# Altium PCB TEMPLATE_PCB_2L.PcbDoc
Units mm, origin at the board's own origin, x right, y up, seen from the top; angles counter-clockwise.
Board outline 70 x 50 mm, 2 copper layers (Top, Bottom), stack 1.54 mm thick; 15 components, 11 nets, 66 pads, 3 vias.
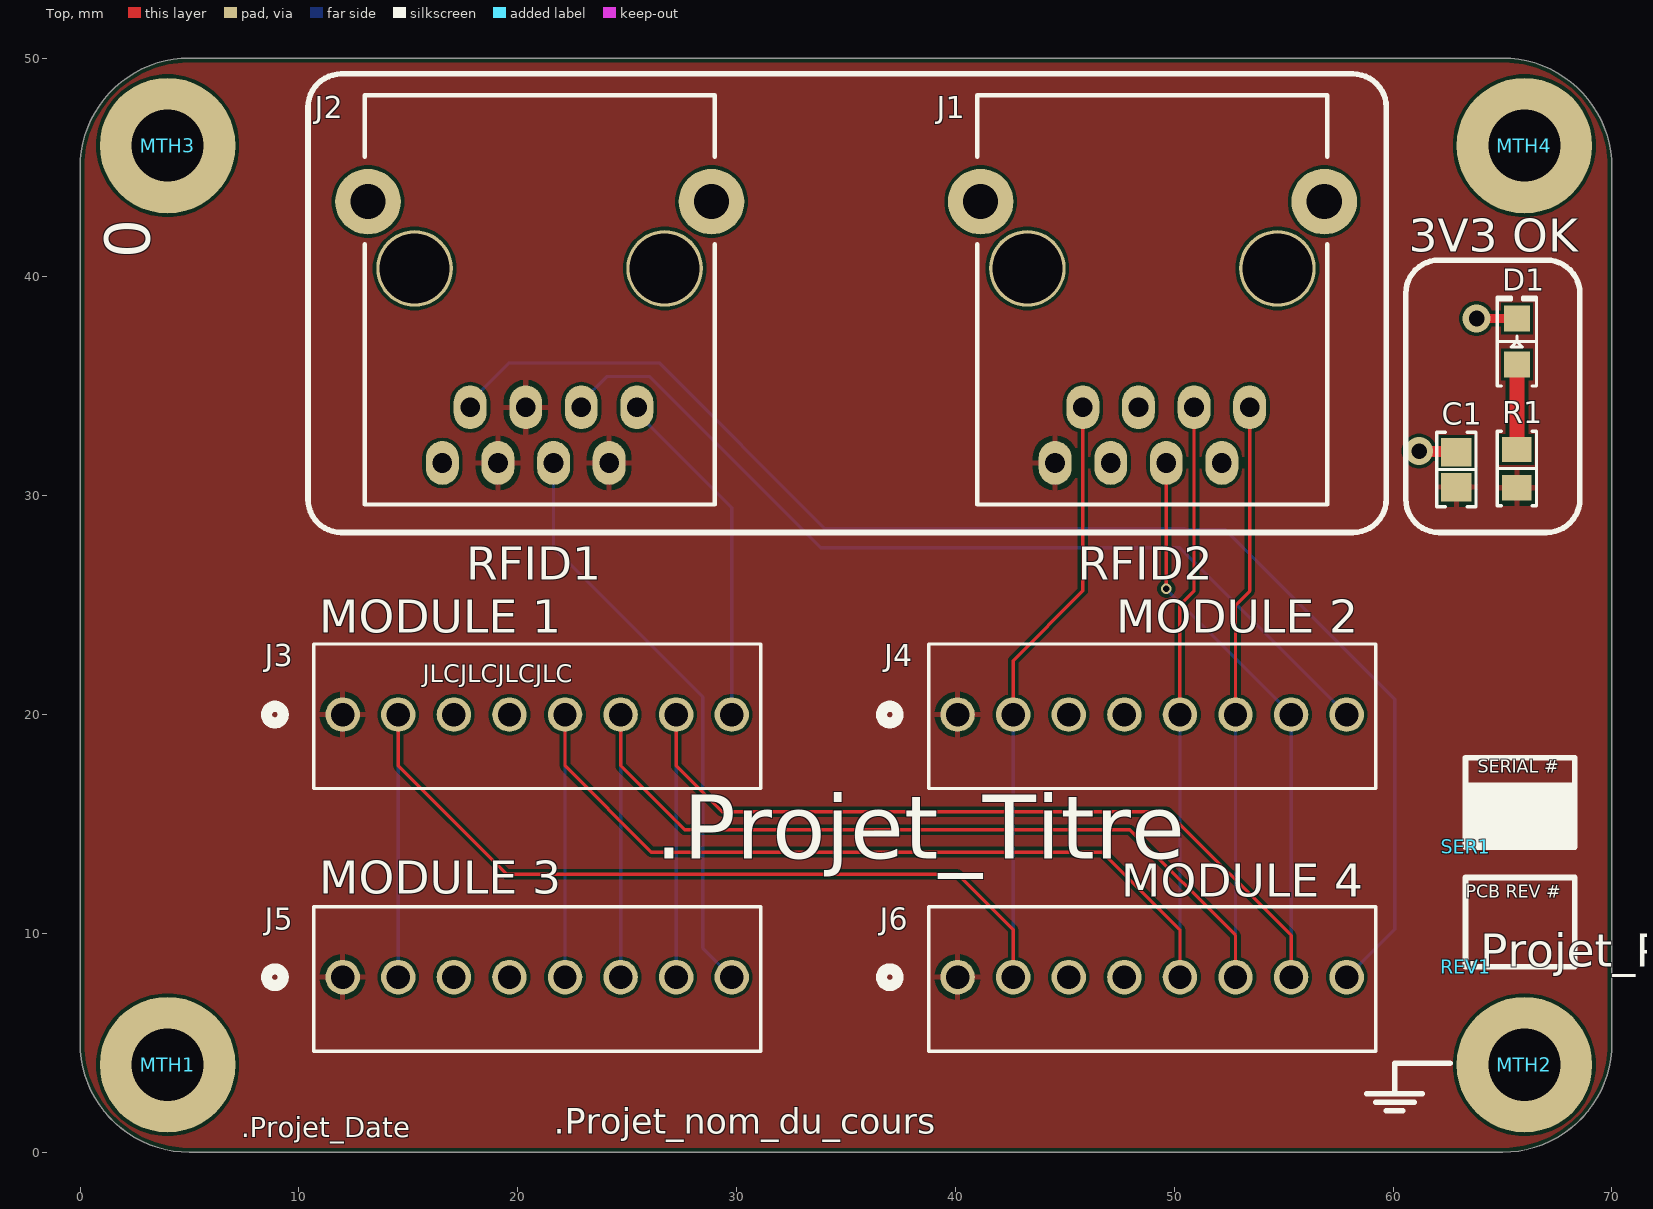
[diagram p0: Top view]
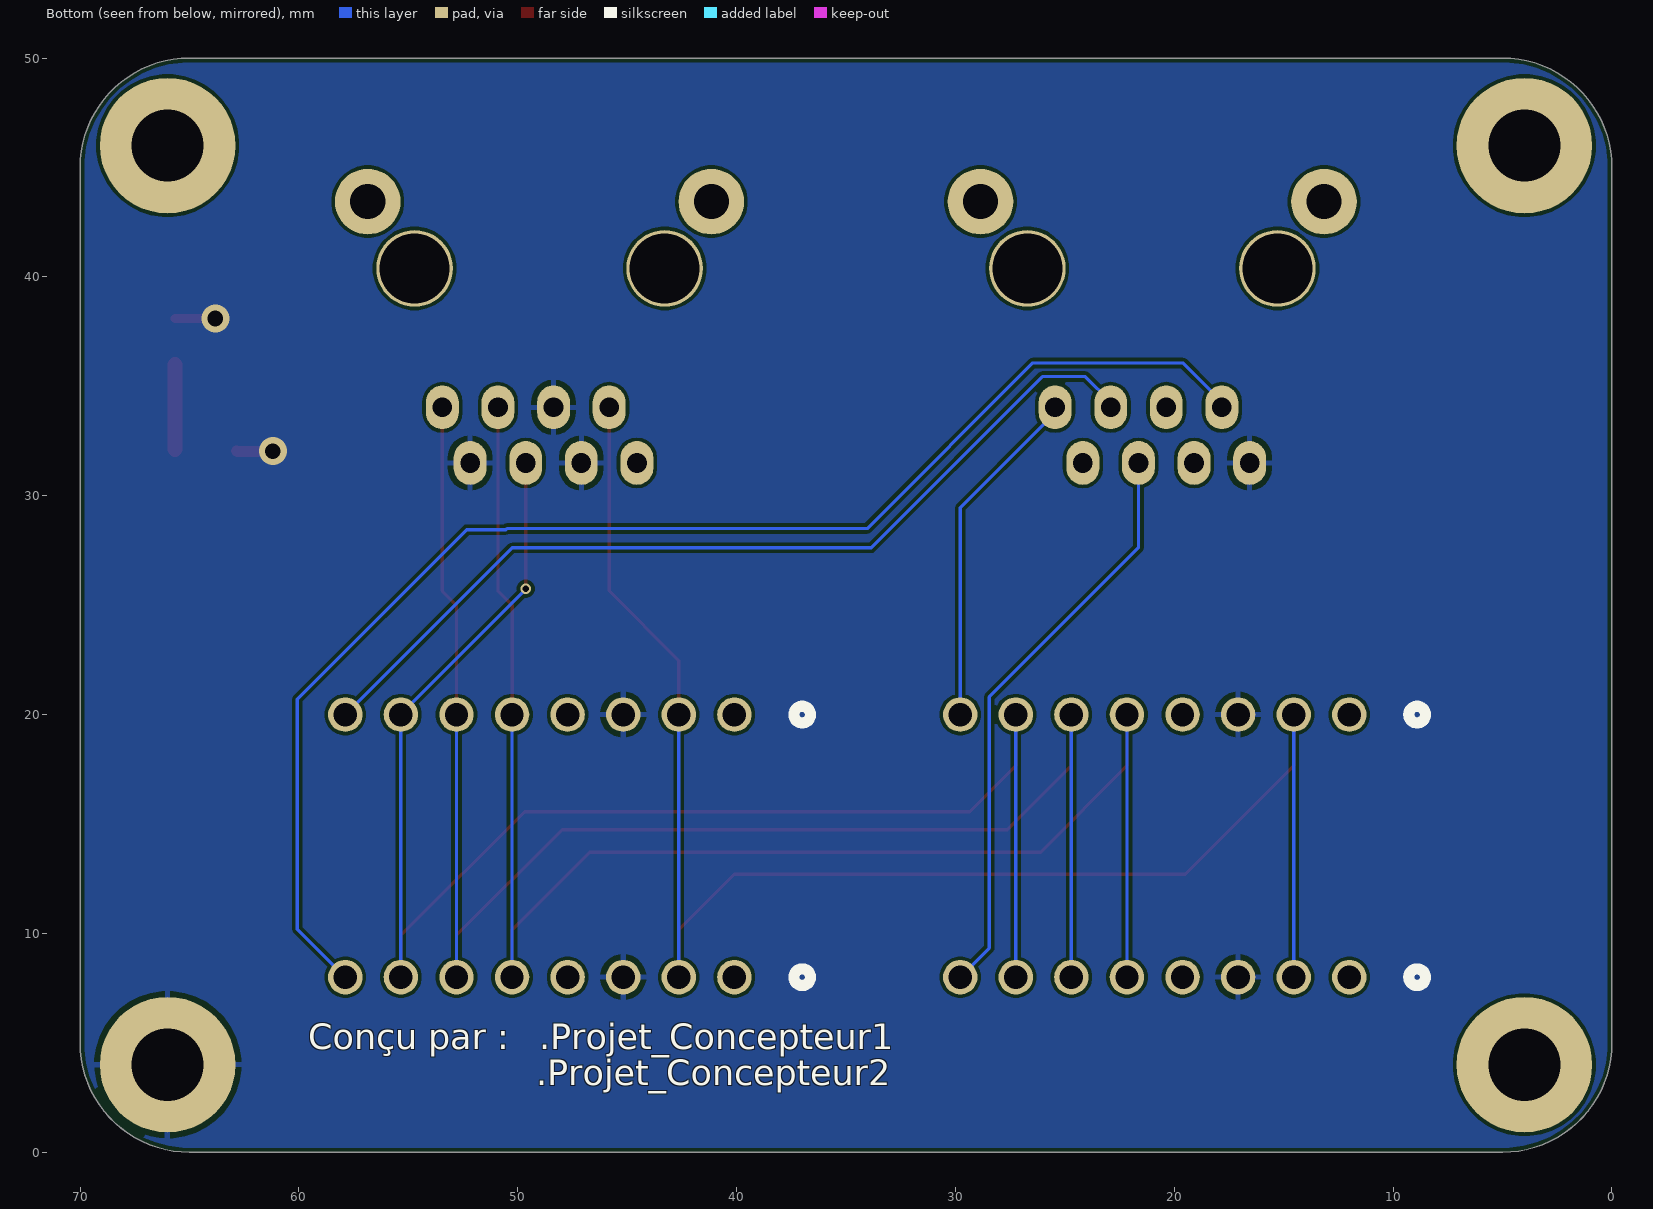
[diagram p1: Bottom view, seen from below]
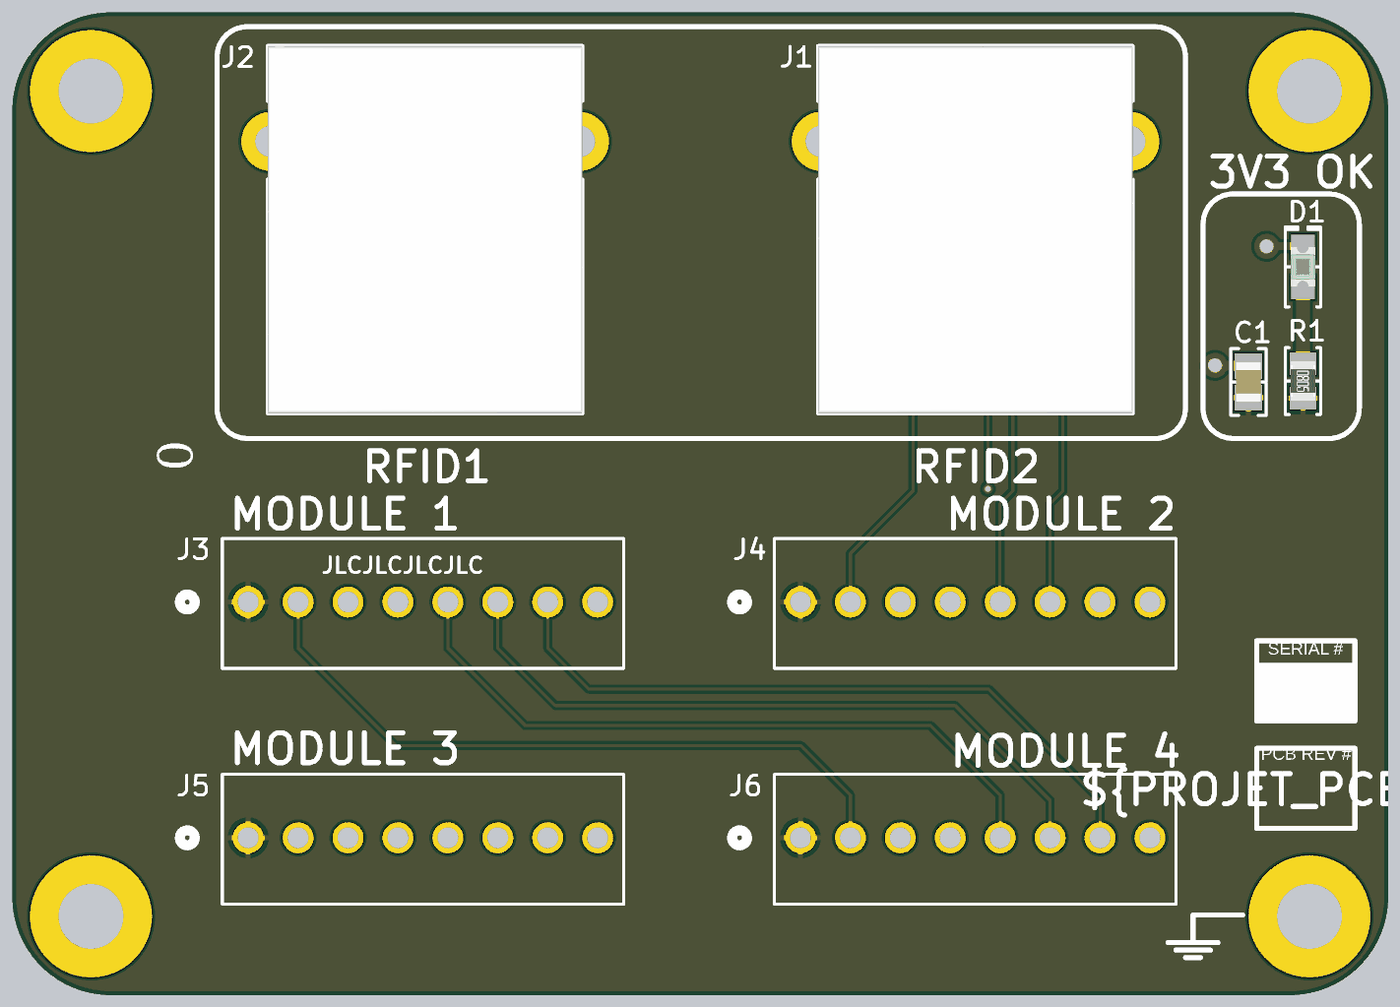
[diagram p2: 3D render of the assembled board from above, using the file's embedded part models]

## Layer stack, top to bottom
Top Solder: solder mask 0.0102, Solder Resist, Dk 3.5
Top: signal copper 0.035
Dielectric 1: core 1.47, FR-4, Dk 4.6
Bottom: signal copper 0.035
Bottom Solder: solder mask 0.0102, Solder Resist, Dk 3.5

## Board outline
0,5 0,45 cw(c5,45) 5,50 65,50 cw(c65,45) 70,45 70,5 cw(c65,5) 65,0 5,0 cw(c5,5)

## Design rules (kind name [scope] priority, off if disabled: settings)
BoardOutlineClearance [All] p1: gap=0.2 ignorepadtopadclearanceinfootprint=FALSE except(0: Arc-SplitContinuation Track-SplitContinuation SMDPad-SplitContinuation THPad-SplitContinuation Via-SplitContinuation Fill-SplitContinuation Poly-SplitContinuation Region-SplitContinuation Text-SplitContinuation)
Clearance "Schematic Clearance Constraint_1" [InComponent('REV1')] p1: gap=0.254 ignorepadtopadclearanceinfootprint=FALSE except(0: Arc-Text Track-Text Text-Text)
Clearance "Schematic Clearance Constraint" [InComponent('SER1')] p2: gap=0.254 ignorepadtopadclearanceinfootprint=FALSE except(0: Arc-Text Track-Text Text-Text)
Clearance [All] p3: gap=0.152 ignorepadtopadclearanceinfootprint=FALSE except(0.127: Arc-Arc Arc-Track Arc-Hole Track-Track Track-Hole SMDPad-Fill SMDPad-Poly SMDPad-Region SMDPad-Hole THPad-Hole Via-Hole Fill-Hole Poly-Hole Region-Hole Text-Hole; 0.2: Arc-SMDPad Track-SMDPad; 0.254: Arc-Via Track-Via Via-Via; 0.33: Arc-THPad Track-THPad; 0.5: THPad-THPad)
ComponentClearance "Schematic Component Clearance Constraint_1" [InComponent('SER1')] p1: gap=0 collisioncheckmode=3 verticalgap=0 showdistances=FALSE
ComponentClearance "Schematic Component Clearance Constraint" [InComponent('REV1')] p2: gap=0 collisioncheckmode=3 verticalgap=0 showdistances=FALSE
ComponentClearance [All] p3: gap=0.102 collisioncheckmode=3 verticalgap=0.102 showdistances=FALSE
HoleSize [All] p1: absolutevalues=TRUE maxlimit=6.3 minlimit=0.3 maxpercent=80.000 minpercent=20.000
HoleToHoleClearance [All] p1: gap=0.45 allowstackedmicrovias=FALSE
MinimumAnnularRing [All] p1: minimumring=0.1
MinimumSolderMaskSliver [All] p1: minsoldermaskwidth=0.1
PlaneClearance [All] p1: clearance=0.152
PlaneConnect [All] p1: pad.planeconnectstyle=Relief pad.reliefexpansion=0.508 pad.reliefentries=4 pad.reliefconductorwidth=0.254 pad.reliefairgap=0.254 via.planeconnectstyle=Direct via.reliefexpansion=0.508 via.reliefentries=4 via.reliefconductorwidth=0.254 via.reliefairgap=0.254
PolygonConnect [All] p1: thpad.connectstyle=Relief thpad.reliefconductorwidth=0.254 thpad.reliefentries=4 thpad.polygonreliefangle="90 Angle" thpad.airgapwidth=0.254 smdpad.connectstyle=Relief smdpad.reliefconductorwidth=0.254 smdpad.reliefentries=4 smdpad.polygonreliefangle="90 Angle" smdpad.airgapwidth=0.254 via.connectstyle=Direct via.reliefconductorwidth=0.254 via.reliefentries=4 via.polygonreliefangle="90 Angle" via.airgapwidth=0.254
RoutingVias [All] p1: holewidth=0.3 width=0.5 viastyle="Through Hole" minholewidth=0.3 minwidth=0.5 maxholewidth=6.3 maxwidth=6.5
SilkToSilkClearance [All] p1: silktosilkclearance=0.102
SilkToSolderMaskClearance [IsPad] p1: minsilkscreentomaskgap=0.024 clearancetoexposedcopper=FALSE
SolderMaskExpansion SolderMaskExpansion_Via [isVia] p1: expansion=0.102 istentingtop=TRUE
SolderMaskExpansion [All] p2: expansion=0.051 istentingtop=FALSE
SupplyNets "Schematic Supply Nets_1" [InNet('3V3')] p1: voltage=0.000
SupplyNets "Schematic Supply Nets" [InNet('GND')] p2: voltage=0.000
Width [All] p1: maxlimit=25.4 minlimit=0.127 preferedwidth=0.152 minimp=50.000000 maximp=50.000000 favimp=50.000000
22 further rules are at their usual default settings.

## Classes and differential pairs
component class TEMPLATE_Circuit: C1 D1 J1 J2 J3 J4 J5 J6 MTH1 MTH2 MTH3 MTH4 R1
component class TEMPLATE_Title: REV1 SER1

## Components (designator, comment, footprint, x,y, rotation, side; value= is the part's Value field where it differs from the comment)
C1 "0.1 µF" "CAP 0805_2012" 62.892,31.196 r270 top
D1 "Green" "LED 0805_2012 GREEN" 65.659,37.05 r90 top
J1 "A-2004-2-4-LPS-N-R" "ASSMANN A-2004-2-4-LPS-N-R" 49,39 r180 top locked
J2 "A-2004-2-4-LPS-N-R" "ASSMANN A-2004-2-4-LPS-N-R" 21,39 r180 top locked
J3 "22232081" CONN_A-6373-08A_MOL 12,20 r0 top locked
J4 "22232081" CONN_A-6373-08A_MOL 40.1,20 r0 top locked
J5 "22232081" CONN_A-6373-08A_MOL 12,8 r0 top locked
J6 "22232081" CONN_A-6373-08A_MOL 40.1,8 r0 top locked
MTH1 "MTH_M3" MTH_M3 4,4 r0 top locked
MTH2 "MTH_M3" MTH_M3 66,4 r0 top locked
MTH3 "MTH_M3" MTH_M3 4,46 r0 top locked
MTH4 "MTH_M3" MTH_M3 66,46 r0 top locked
R1 "330 Ohms" "RES 0805_2012" 65.659,31.242 r270 top
REV1 "Revision Cartridge Mini" REV_REVISION_CARTRIDGE_MINI 63.311,8.479 r0 top
SER1 "Serial Cartridge MICRO" SER_SERIAL_CARTRIDGE_MICRO 63.311,13.949 r0 top

## Footprints (in the part's own frame and the unit in brackets; to place one, negate y for a bottom-side part, rotate by r counter-clockwise, add the part's x,y. Pads: shape width x height; smd on the part's side, far side on the other; paste and mask are expansions set on the pad)
"ASSMANN A-2004-2-4-LPS-N-R" [mm]
  oval 1.5x2 hole 0.9: 1(-4.445,4.96) 2(-3.175,7.5) 3(-1.905,4.96) 4(-0.635,7.5) 5(0.635,4.96) 6(1.905,7.5) 7(3.175,4.96) 8(4.445,7.5)
  round 3 hole 1.6: S(-7.855,-4.44) S(7.845,-4.44)
  round 3.5 hole 3.2: S(-5.715,-1.39) S(5.715,-1.39)
  silkscreen extent -8,-9.3 8,9.4, body extent -8,-9.3 8,9.4, height 13.3
"CAP 0805_2012" [mm] "Chip Capacitor, 2-Leads, Body 2.00x1.20mm, IPC Medium Density"
  rect 1.3x1.4 smd: 1(-0.8,0) 2(0.8,0)
  silkscreen extent -1.7,-0.9 1.7,0.9, body extent -1,-0.64 1,0.64, height 1.26
CONN_A-6373-08A_MOL [mil]
  round 62 hole 42: 1(0,0) 2(100,0) 3(200,0) 4(300,0) 5(400,0) 6(500,0) 7(600,0) 8(700,0)
  silkscreen extent -137,-133 752,127
"LED 0805_2012 GREEN" [mm] "Chip Diode, 2-Leads, Body 2.00x1.25mm, IPC Medium Density"
  rect 1.2x1.2 smd: 1(-1.05,0) 2(1.05,0)
  silkscreen extent -2.03,-0.9 2.03,0.9, body extent -1,-0.62 1,0.63, height 0.9
MTH_M3 [mm] "Mounting Hole Metric M3"
  round 6.2 hole 3.3 paste-2539.97 mask+0.07: 1(0,0)
"RES 0805_2012" [mm] "Chip Resistor, 2-Leads, Body 2.00x1.25mm, IPC Medium Density"
  rect 1.15x1.35 smd: 1(-0.875,0) 2(0.875,0)
  silkscreen extent -1.7,-0.9 1.7,0.9, body extent -1,-0.62 1,0.63, height 0.6
REV_REVISION_CARTRIDGE_MINI [mm]
  silkscreen extent 0,0 5,4.08
SER_SERIAL_CARTRIDGE_MICRO [mm]
  silkscreen extent 0,0 5.02,4.08

## Part data
C1: library part 0805J0250104KXT, "CAP CER 0.1UF 25V X7R 0805", Device Package="0805 (2012 Metric)", Manufacturer="Knowles Syfer", Operating Temperature="-55°C ~ 125°C", Supplier Part Number 1=1608-0805J0250104KXTCT-ND, Temperature Coefficient=X7R, Tolerance=±10%, Voltage - Rated=25V, Applications="General Purpose", Capacitance="0.1 µF", ComponentLink1Description=Datasheet, ComponentLink1URL=https://www.knowlescapacitors.com/getattachment/2dbfc8bc-e2b3-4b4d-afb1-43b011b9ebe0/High-Std-Voltage.aspx, ComponentLink2Description="DigiKey Link", ComponentLink2URL=https://www.digikey.com/en/products/detail/knowles-syfer/0805J0250104KXT/6304940, LastUpdated="2024-02-09 8:13:16 PM", Lifecycle Status=Active, Minimum Order=1, Mounting Type="Surface Mount, MLCC", Package / Case="0805 (2012 Metric)", Packaging=TapeAndReel, Part Number=0805J0250104KXT, PartId=57221, Price=0.08, Series=-, Size / Dimension="0.079\" L x 0.049\" W (2.00mm x 1.25mm)", Supplier 1=DigiKey, Thickness (Max)="0.051\" (1.30mm)"
D1: library part 5975316507F, "LED GREEN 0805 SMD", Current - Test=20mA, Device Package="0805 (2012 Metric)", Lens Color=0.93mm, Manufacturer=Dialight, Millicandela Rating=16mcd, Supplier Device Package=0805, Supplier Part Number 1=350-4389-1-ND, Voltage - Forward (Vf) (Typ)=2.2V, Color=Green, ComponentLink1Description=Datasheet, ComponentLink1URL=http://www.dialightsignalsandcomponents.com/Assets/Drawings/2D_Drawings_DrawingDetailedSpec/NewDrawings/18370A.pdf, ComponentLink2Description="DigiKey Link", ComponentLink2URL=https://www.digikey.com/en/products/detail/dialight/5975316507F/9385444, Configuration=Standard, Height (Max)=0.93mm, LastUpdated="2024-06-03 8:00:30 PM", Lens Size="1.40mm x 1.24mm", Lens Style="Rectangle with Flat Top", Lifecycle Status=Active, Minimum Order=1, Mounting Type="Surface Mount", Package / Case="0805 (2012 Metric)", Packaging=TapeAndReel, Part Number=5975316507F, Part Status=Active, PartId=245, Price=0.12, Series=597, Size / Dimension="2.00mm L x 1.25mm W", Supplier 1=DigiKey, Wavelength - Dominant=560nm
J1 J2: "CONN MOD JACK 8P8C R/A SHIELDED", LED Color="Does Not Contain LED", Manufacturer="Assmann WSW Components", Supplier Part Number 1=AE10387-ND, ComponentLink1Description=Datasheet, ComponentLink1URL=http://www.assmann-wsw.com/fileadmin/datasheets/ASS_7323_CO.pdf, ComponentLink2Description="DigiKey Link", ComponentLink2URL=http://digikey.com/product-detail/en/assmann-wsw-components/A-2004-2-4-LPS-N-R/AE10387-ND/2183638, Connector Type=Jack, Contact Finish=Gold, Contact Material="Phosphor Bronze", Features="Board Lock", LastUpdated="2020-01-15 3:54:20 AM", Lifecycle Status=Active, Minimum Order=1, Mounting Type="Through Hole", Number of Ports=1, Number of Positions/Contacts="8p8c (RJ45, Ethernet)", Number of Rows=1, Orientation="90° Angle (Right)", Packaging=Tray, Part Number=A-2004-2-4-LPS-N-R, Part Status=Active, Price=1.05, Series=-, Shielding=Shielded, Supplier 1=DigiKey, Tab Direction=Down, Termination=Solder
J3 J4 J5 J6: Package=None, Availability=Unavailable, MP=22232081, Price=None
MTH1 MTH2 MTH3 MTH4: library part CMP-006-000008-2, "MTH - MOUNTING HOLE M3 PLATED - M3", Package=M3, Assembly Type=NONE, Component Type="Standard (No BOM)", Design Item ID=MTH_M3, HelpURL=https://littlemachineshop.com/images/gallery/PDF/TapDrillSizes.pdf, Pin Count=1, Source=CEGEP_SHERBROOKE_TGE_LIBRARY.SchLib
R1: library part ERJ-PB6B3300V, "RES SMD 330 OHM 0.1% 1/4W 0805", Device Package="0805 (2012 Metric)", Manufacturer="Panasonic Electronic Components", Operating Temperature="-55°C ~ 155°C", Power (Watts)="0.25W, 1/4W", Ratings=AEC-Q200, Supplier Device Package=0805, Supplier Part Number 1=P20537CT-ND, Temperature Coefficient=±50ppm/°C, Tolerance=±0.1%, ComponentLink1Description=Datasheet, ComponentLink1URL=https://industrial.panasonic.com/cdbs/www-data/pdf/RDM0000/AOA0000C328.pdf, ComponentLink2Description="DigiKey Link", ComponentLink2URL=https://www.digikey.com/en/products/detail/panasonic-electronic-components/ERJ-PB6B3300V/6213320, Composition="Thick Film", Features="Automotive AEC-Q200, Pulse Withstanding", Height - Seated (Max)="0.028\" (0.70mm)", LastUpdated="2024-02-08 9:02:05 PM", Lifecycle Status=Active, Minimum Order=1, Number of Terminations=2, Package / Case="0805 (2012 Metric)", Packaging=TapeAndReel, Part Number=ERJ-PB6B3300V, Part Status=Active, PartId=35583, Price=0.04, Resistance="330 Ohms", Series=ERJ-PB6, Size / Dimension="0.079\" L x 0.049\" W (2.00mm x 1.25mm)", Supplier 1=DigiKey
REV1: library part REV_REVISION_CARTRIDGE_MINI, "REV - REVISION CARTRIDGE MINI", Assembly Type=NONE, Rule="Component Clearance Constraint [Horizontal Clearance = 0mil    Vertical Clearance = 0mil]"
SER1: library part SER_SERIAL_CARTRIDGE_MICRO, "SER - SERIAL CARTRIDGE MICRO", Assembly Type=NONE, Rule="Component Clearance Constraint [Horizontal Clearance = 0mil    Vertical Clearance = 0mil]"

## Via types
v1: diameter 1.27, hole 0.711, Top to Bottom, tented both sides, 2 vias
v2: diameter 0.5, hole 0.3, Top to Bottom, tented both sides, 1 vias

## Nets (pads, with @x,y where several pads share a name; then routed paths per layer and width w, separated by ;. In a path a pad name is that pad's centre, name@x,y a point inside that pad or via, vN(x,y) a via of type N, cw(c..) or ccw(c..) an arc to the next point about the centre after c; other vN are vias at no path point)
3V3: C1.2 J1.8 J2.2 J2.5 J2.6 J3.1 J4.1 J5.1 J6.1 R1.2
GND: C1.1 D1.2 J1.2 J1.5 J1.6 J2.8 J3.3 J4.3 J5.3 J6.3 MTH2.1 | length 3.6
  Top w0.152: C1.1@62.846,32.042 C1.1
  Top w0.4: v1(63.815,38.1) D1.2
  Top w0.508: v1(61.189,32.042) 61.212,32.019 62.823,32.019 C1.1@62.846,32.042
MISO_RFID: J1.3 J3.5 J4.5 J5.5 J6.5 | length 74
  Top w0.152: J3.5 22.16,17.653 26.097,13.716 28.067,13.716 46.712,13.716 50.26,10.168 J6.5 ; J4.5 50.25,20.01 50.25,24.999 50.905,25.654 J1.3
  Bottom w0.152: J5.5 J3.5 ; J6.5 J4.5
MOSI_RFID: J1.1 J3.6 J4.6 J5.6 J6.6 | length 73.9
  Top w0.152: J3.6 24.7,17.653 27.621,14.732 31.101,14.732 47.973,14.732 52.8,9.905 J6.6 ; J4.6 52.8,24.999 53.445,25.644 J1.1
  Bottom w0.152: J5.6 J3.6 ; J6.6 J4.6
NetD1_1: D1.1 R1.1 | length 3.9
  Top w0.7: R1.1 D1.1
RESET_RFID: J1.7 J3.2 J4.2 J5.2 J6.2 | length 75.1
  Top w0.152: J3.2 14.54,17.653 19.493,12.7 21.635,12.7 40.108,12.7 42.64,10.168 J6.2 ; J4.2 42.64,22.469 45.825,25.654 J1.7
  Bottom w0.152: J5.2 J3.2 ; J6.2 J4.2
SCK_RFID: J1.4 J3.7 J4.7 J5.7 J6.7 | length 73.4
  Top w0.152: J3.7 27.24,17.653 29.334,15.559 33.274,15.559 49.686,15.559 55.34,9.905 J6.7 ; v2(49.635,25.751) J1.4
  Bottom w0.152: J5.7 J3.7 ; v2(49.635,25.751) 49.635,25.728 55.34,20.023 J4.7 J6.7
SS0_RFID: J2.1 J3.8 | length 15.8
  Bottom w0.152: J2.1 25.445,33.79 29.78,29.455 J3.8
SS1_RFID: J2.3 J4.8 | length 42.1
  Bottom w0.152: J2.3 22.905,34.29 24.061,35.446 26.022,35.446 33.848,27.62 50.26,27.62 J4.8
SS2_RFID: J2.4 J5.8 | length 26.9
  Bottom w0.152: J2.4 21.635,27.62 28.448,20.807 28.448,9.332 J5.8
SS3_RFID: J2.7 J6.8 | length 63.2
  Bottom w0.152: J2.7 17.825,34.29 19.603,36.068 26.468,36.068 34.036,28.5 50.494,28.5 50.546,28.448 52.324,28.448 60.071,20.701 60.071,10.191 J6.8
pads on no net: J1.S J2.S J3.4 J4.4 J5.4 J6.4 MTH1.1 MTH3.1 MTH4.1

## Polygon pours and split planes (outlines as drawn)
GND on Bottom "GND_L02_P001" (solid, pour order 1): 0,5 0,45 cw(c5,45) 5,50 65,50 cw(c65,45) 70,45 70,5 cw(c65,5) 65,0 5,0 cw(c5,5)
3V3 on Top "3V3_L01_P000" (solid, pour order 0): 0,5 0,45 cw(c5,45) 5,50 65,50 cw(c65,45) 70,45 70,5 cw(c65,5) 65,0 5,0 cw(c5,5)

## Silkscreen, mask and mechanical layers (free items; w line width, h text height)
Top Overlay:
  lines w0.254: 58.801,2.667 61.341,2.667 60.071,2.667 60.071,4.064 62.601,4.064 ; 59.201,2.286 60.96,2.286 60.071,2.286 ; 59.69,1.905 60.452,1.905 60.071,1.905 ; 10.414,29.845 ccw(c11.938,29.845) 11.938,28.321 58.166,28.321 ccw(c58.166,29.845) 59.69,29.845 59.69,47.752 ccw(c58.166,47.752) 58.166,49.276 11.938,49.276 ccw(c11.938,47.752) 10.414,47.752 10.414,29.845 ; 60.579,29.845 ccw(c62.103,29.845) 62.103,28.321 67.012,28.321 ccw(c67.012,29.845) 68.536,29.845 68.536,39.243 ccw(c67.012,39.243) 67.012,40.767 62.103,40.767 ccw(c62.103,39.243) 60.579,39.243 60.579,29.845
  text ".Projet_Concepteur4" at -24.765,59.944 h2
  text "0" at 0.446,42.641 h3.5 r270
  text "3V3 OK" at 60.706,41.148 h1.52
  text "RFID1" at 17.653,26.162 h1.52
  text "RFID2" at 45.593,26.162 h1.52
  text "MODULE 1" at 10.922,23.749 h1.52
  text "MODULE 2" at 47.349,23.749 h1.52
  text "JLCJLCJLCJLC" at 15.648,21.486 h0.8
  text ".Projet_Titre" at 26.283,12.454 h5
  text "MODULE 3" at 10.922,11.811 h1.52
  text "MODULE 4" at 47.585,11.683 h1.52
  text ".Projet_Date" at 7.354,0.689 h0.91
  text ".Projet_nom_du_cours" at 21.635,0.449 h2
Bottom Overlay:
  text ".Projet_Concepteur1" at 49.022,4.318 h2
  text "Conçu par :" at 59.563,4.318 h2
  text ".Projet_Concepteur2" at 49.149,2.667 h2
Board Outline:
  the board outline again, w0.254

## Text inside footprints (layer, text, board x,y; h text height)
REV1: Top Overlay "PCB REV #" at 63.311,11.429 h1
SER1: Top Overlay "SERIAL #" at 63.874,17.141 h1